# EAGLE board PDM (EAGLE 9.5.1)
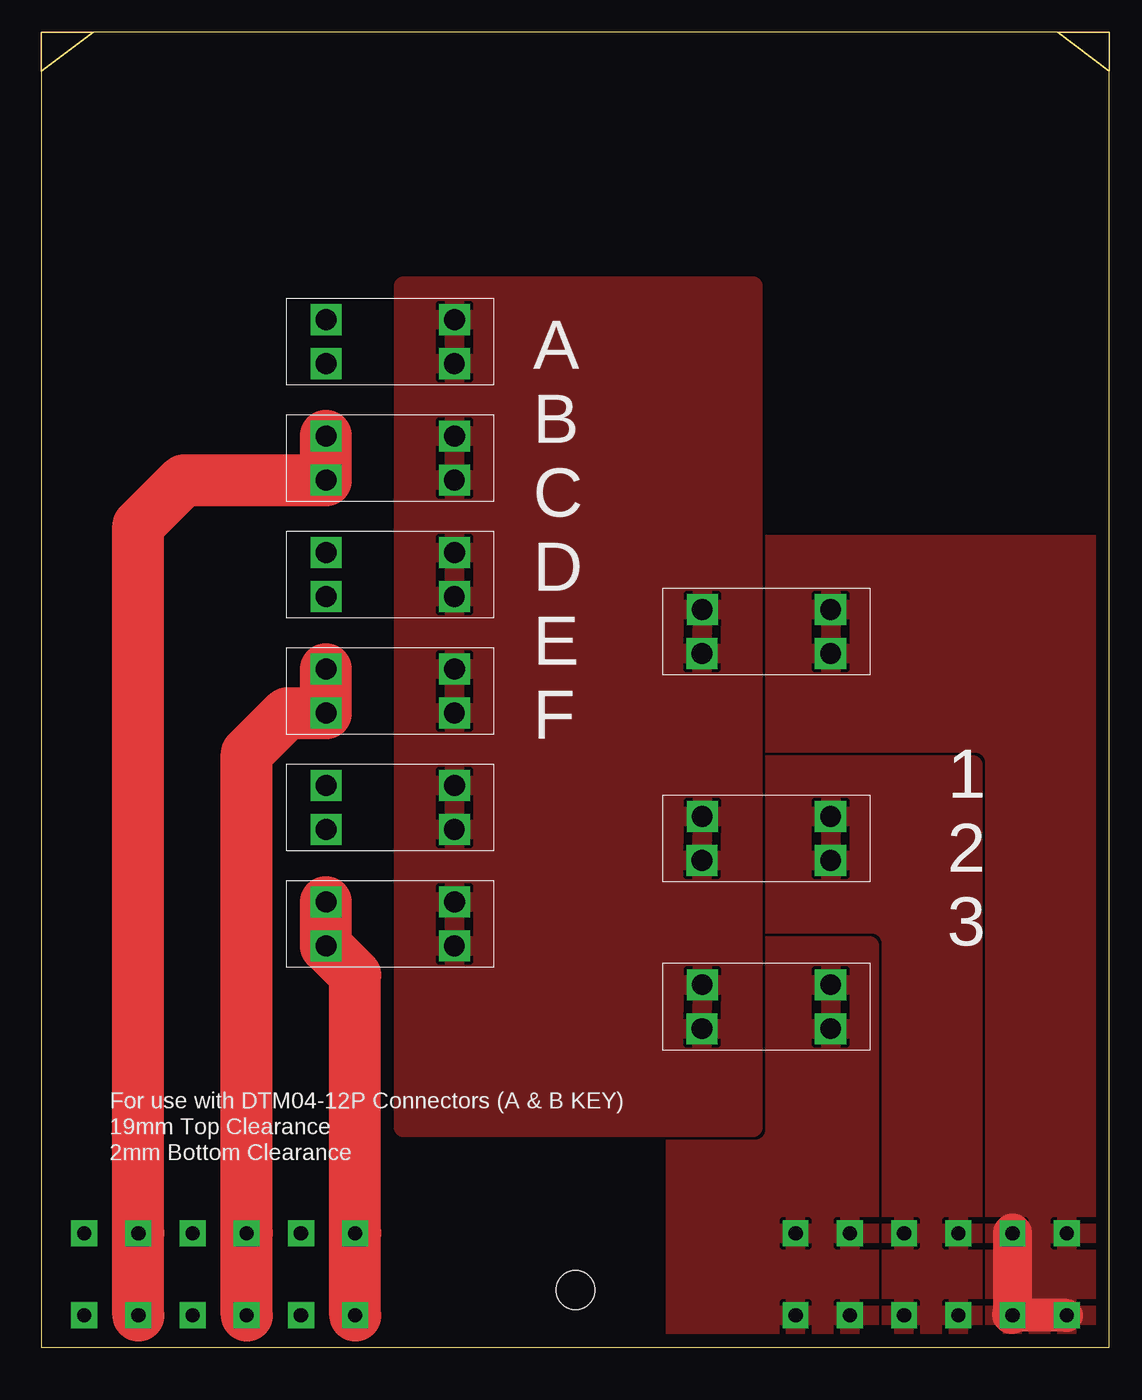
[diagram p0: board, top side]
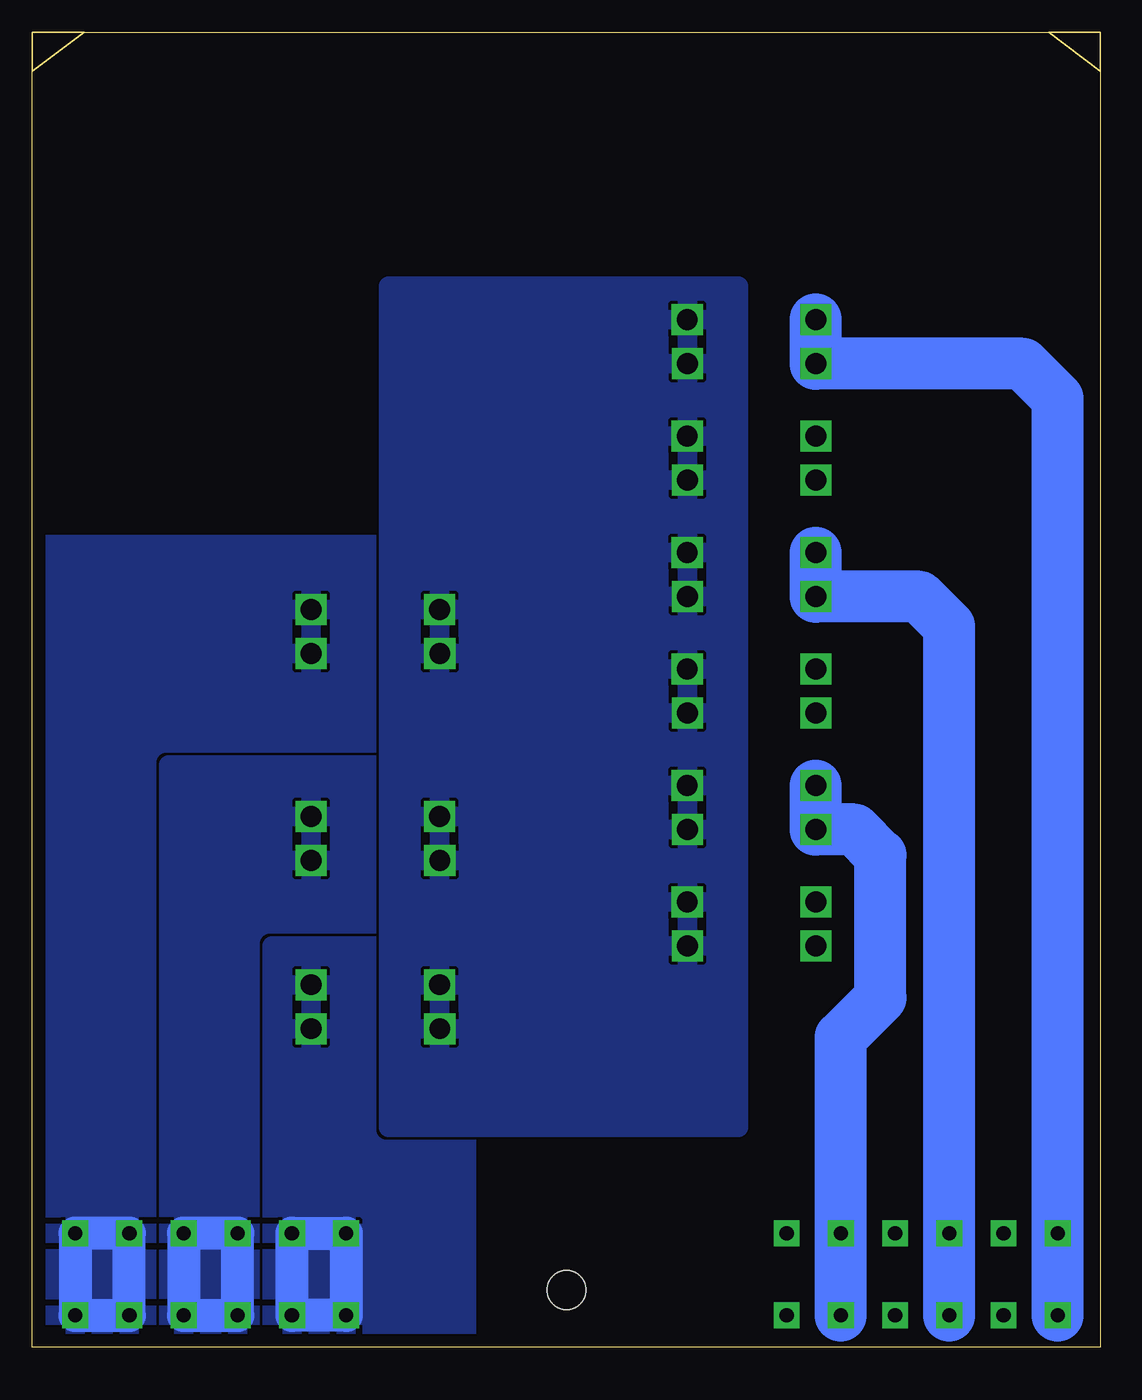
[diagram p1: board, bottom side, seen from below]

Size 82.55 x 101.6 mm. Coordinates in mm from the lower left corner, seen from the top.
Outline: 0,0 82.55,0 82.55,101.6 0,101.6 0,0
Copper layers (1*16): Top 0.035mm / dielectric 1.5mm / Bottom 0.035mm
Design rules "default": minimum track width 6mil, minimum drill 0.35mm, track to track 6mil, track to pad 6mil, pad to pad 6mil, via to via 6mil, smd to smd 6mil, copper to edge 40mil, drill to drill 6mil, minimum pad ring 10mil, minimum via ring 8mil, stop-mask expansion 4mil, vias tented up to drill 0mil, thermal gap 10mil
Net classes: 0 default: width 1 mm, clearance 0.203 mm
tKeepout: area 40.3,88.6 to 42.3,98.5
Milling: area 0,98.6 to 4,101.6; area 78.5,98.6 to 82.5,101.6

## Footprints (pad centres in the part's own frame; a part is rotated, then mirrored left to right if it is on the bottom)
3568 = drill 1.6 square: L1 0,3.4; L2 0,0; R1 9.94,3.4; R2 9.92,0
DE_12X2_PIN_HEADER = drill 1.1 pad 2 square: 1A 17.02,4.39; 1B -17.02,-1.96; 2A 21.21,4.39; 2B -21.21,-1.96; 3A 25.4,4.39; 3B -25.4,-1.96; 4A 29.59,4.39; 4B -29.59,-1.96; 5A 33.78,4.39; 5B -33.78,-1.96; 6A 37.97,4.39; 6B -37.97,-1.96; 7A 37.97,-1.96; 7B -37.97,4.39; 8A 33.78,-1.96; 8B -33.78,4.39; 9A 29.59,-1.96; 9B -29.59,4.39; 10A 25.4,-1.96; 10B -25.4,4.39; 11A 21.21,-1.96; 11B -21.21,4.39; 12A 17.02,-1.96; 12B -17.02,4.39 | hole 3: 0,0

## Placement (x,y rotation side)
CH1  3568FUSEHOLDER  [3568]  22,76 0 top
CH2  3568FUSEHOLDER  [3568]  22,67 0 top
CH3  3568FUSEHOLDER  [3568]  22,58 0 top
CH4  3568FUSEHOLDER  [3568]  22,49 0 top
CH5  3568FUSEHOLDER  [3568]  22,40 0 top
CH6  3568FUSEHOLDER  [3568]  22,31 0 top
CH7  3568FUSEHOLDER  [3568]  61,57 180 top
CH9  3568FUSEHOLDER  [3568]  61,41 180 top
CH11  3568FUSEHOLDER  [3568]  61,28 180 top
U$4  DTM1312PA12BR008  [DE_12X2_PIN_HEADER]  41.27,4.41 0 top

## Library data of the parts
CH1-CH7 CH9 CH11 = ACC-MB-R0
U$4 = CUSTOM_PARTS

## Nets
CH1: CH1.L1 CH1.L2 U$4.6B U$4.7B
CH2: CH2.L1 CH2.L2 U$4.5B U$4.8B
CH3: CH3.L1 CH3.L2 U$4.4B U$4.9B
CH4: CH4.L1 CH4.L2 U$4.3B U$4.10B
CH5: CH5.L1 CH5.L2 U$4.2B U$4.11B
CH6: CH6.L1 CH6.L2 U$4.1B U$4.12B
CH8: CH7.L1 CH7.L2 U$4.5A U$4.6A U$4.7A U$4.8A
CH10: CH9.L1 CH9.L2 U$4.3A U$4.4A U$4.9A U$4.10A
CH11: CH11.L1 CH11.L2 U$4.1A U$4.2A U$4.11A U$4.12A
COMMON: CH1.R1 CH1.R2 CH2.R1 CH2.R2 CH3.R1 CH3.R2 CH4.R1 CH4.R2 CH5.R1 CH5.R2 CH6.R1 CH6.R2 CH7.R1 CH7.R2 CH9.R1 CH9.R2 CH11.R1 CH11.R2

## Tracks (layer width: path | path; a pad name or v marks a point on that pad's centre or on a via)
CH1
  Bottom 4: U$4.6B U$4.7B 3.31,73.31 6,76 CH1.L2 CH1.L1
CH2
  Top 4: U$4.5B U$4.8B 7.5,63.49 11,67 CH2.L2 CH2.L1
CH3
  Bottom 4: U$4.4B U$4.9B 11.69,55.69 14,58 CH3.L2 CH3.L1
CH4
  Top 4: U$4.3B U$4.10B 15.88,45.88 19,49 CH4.L2 CH4.L1
CH5
  Bottom 4: U$4.2B U$4.11B 20.07,23.93 17,27 17,38 19,40 CH5.L2 CH5.L1
CH6
  Top 4: U$4.1B U$4.12B 24.25,28.75 CH6.L2 CH6.L1
CH8
  Top 2.54: U$4.7A 75.18,2.45 75.06,2.57
  Top 3: U$4.5A 75.06,2.57 75,2.52
  Bottom 2.54: U$4.5A U$4.6A U$4.7A U$4.8A U$4.5A
  pour Top (rank 4): 46,62 86,62 86,-3 48,-3 48,60
  pour Bottom (rank 4): 86,62 46,62 46,-1 48,-3 86,-3
CH10
  Bottom 2.54: U$4.3A U$4.4A U$4.9A U$4.10A U$4.3A
  pour Bottom (rank 3): 72,-2 72,45 45,45 45,-2
  pour Top (rank 3): 45,45 72,45 72,-2 45,-2
CH11
  Bottom 2.54: U$4.1A U$4.12A U$4.11A U$4.2A U$4.1A
  pour Top (rank 2): 64,-2 64,31 49,31 49,-2
  pour Bottom (rank 2): 64,31 49,31 49,-2 64,-2
COMMON
  pour Top: 28,82 28,17 55,17 55,82
  pour Bottom: 28,82 28,17 55,17 55,82

## Text on the board
tNames: A / B / C / D / E / F | 1 / 2 / 3